# Altium PCB projet_pcb_etu.PCBDOC
Units mm, origin at the board's own origin, x right, y up, seen from the top; angles counter-clockwise.
Board outline 141.6 x 100.33 mm, 2 copper layers (TopLayer, BottomLayer); 68 components, 53 nets, 263 pads, 121 vias.
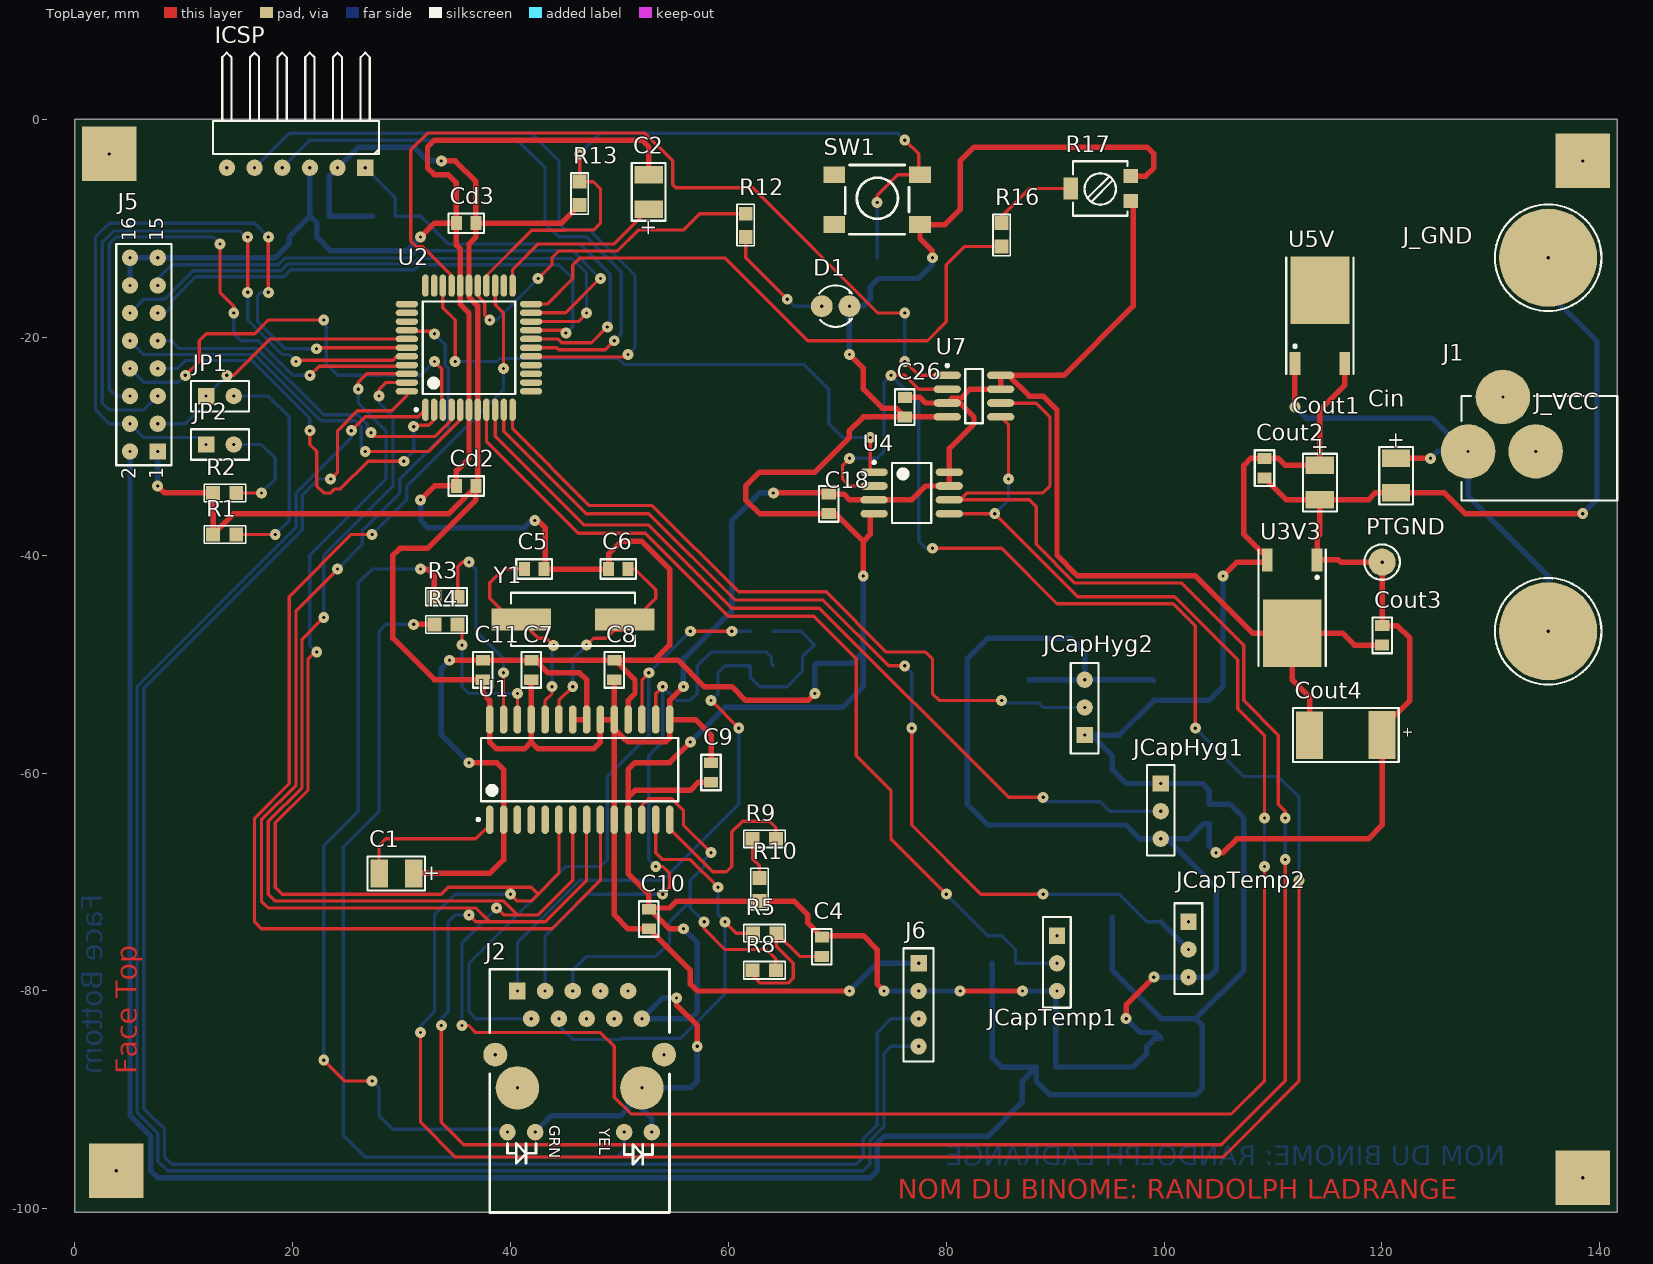
[diagram p0: TopLayer view]
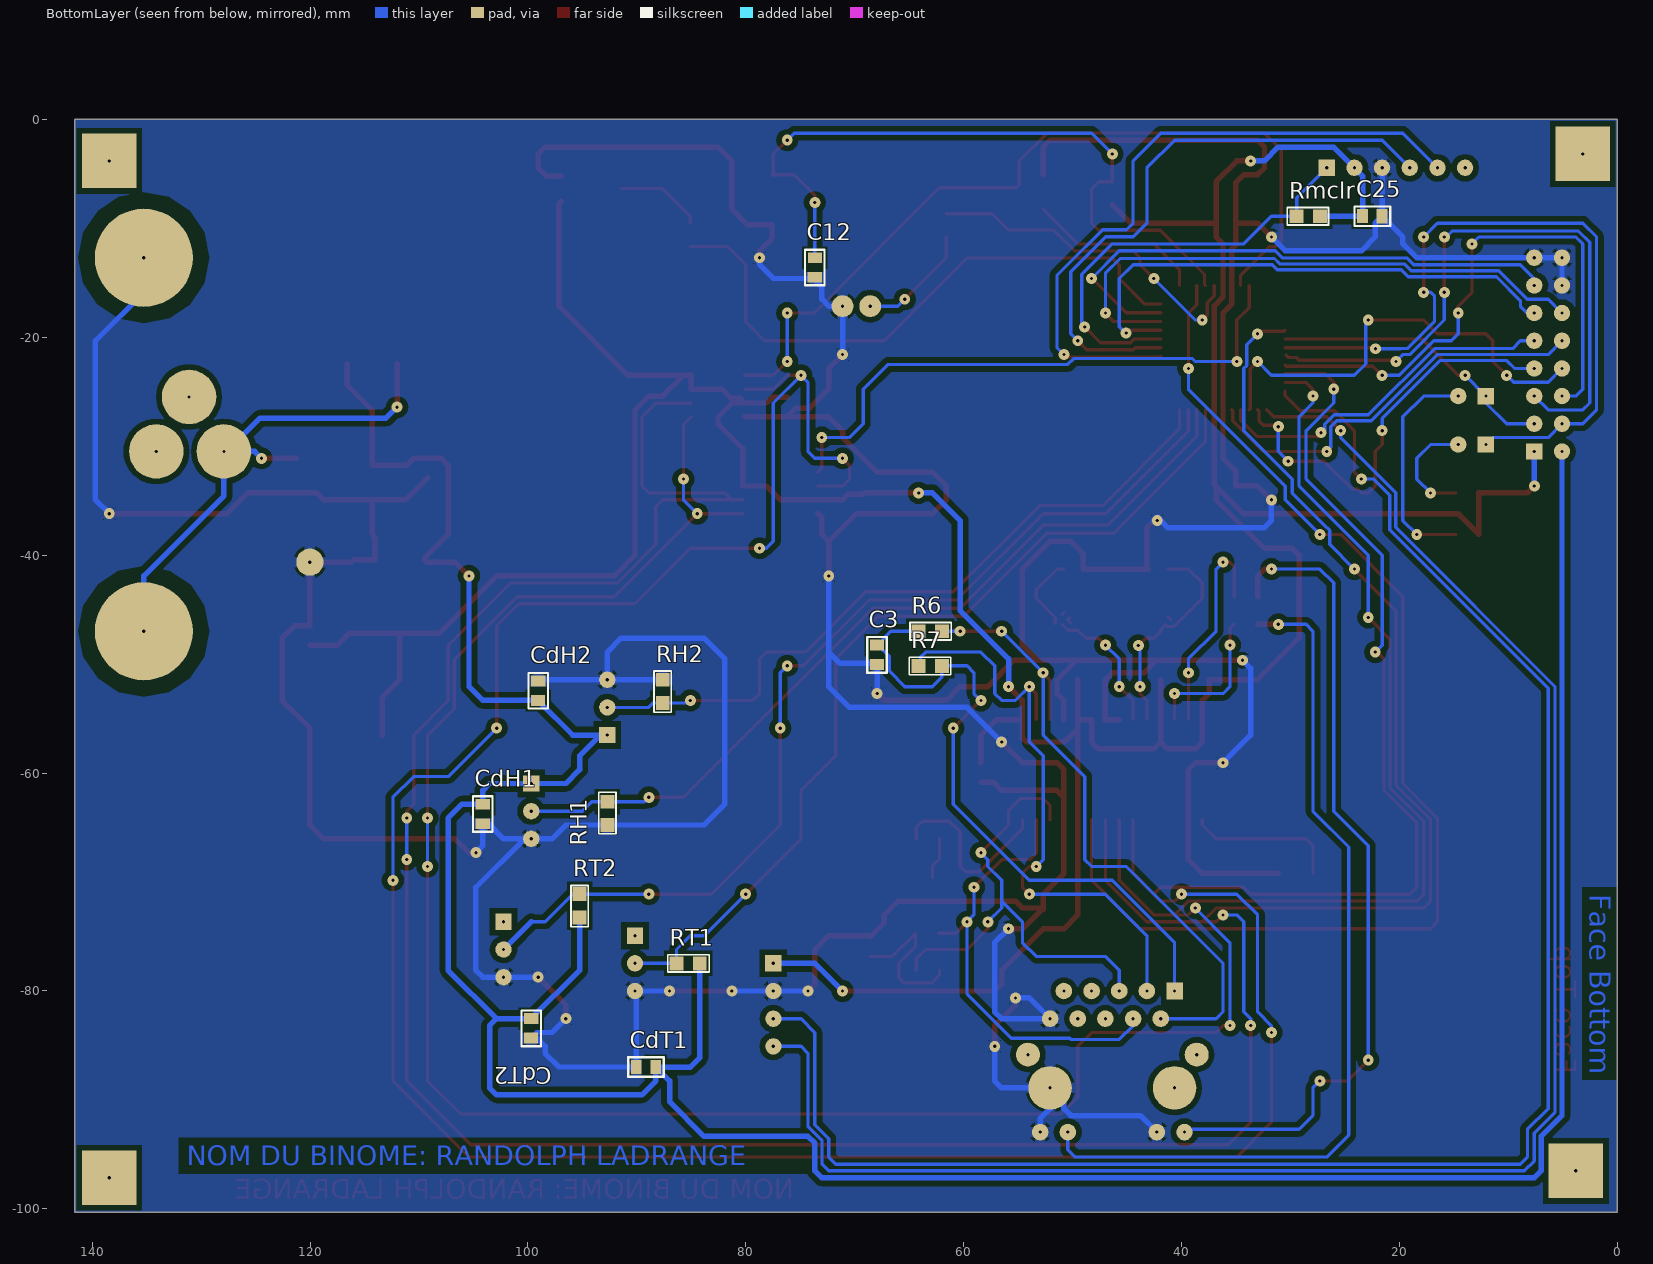
[diagram p1: BottomLayer view, seen from below]
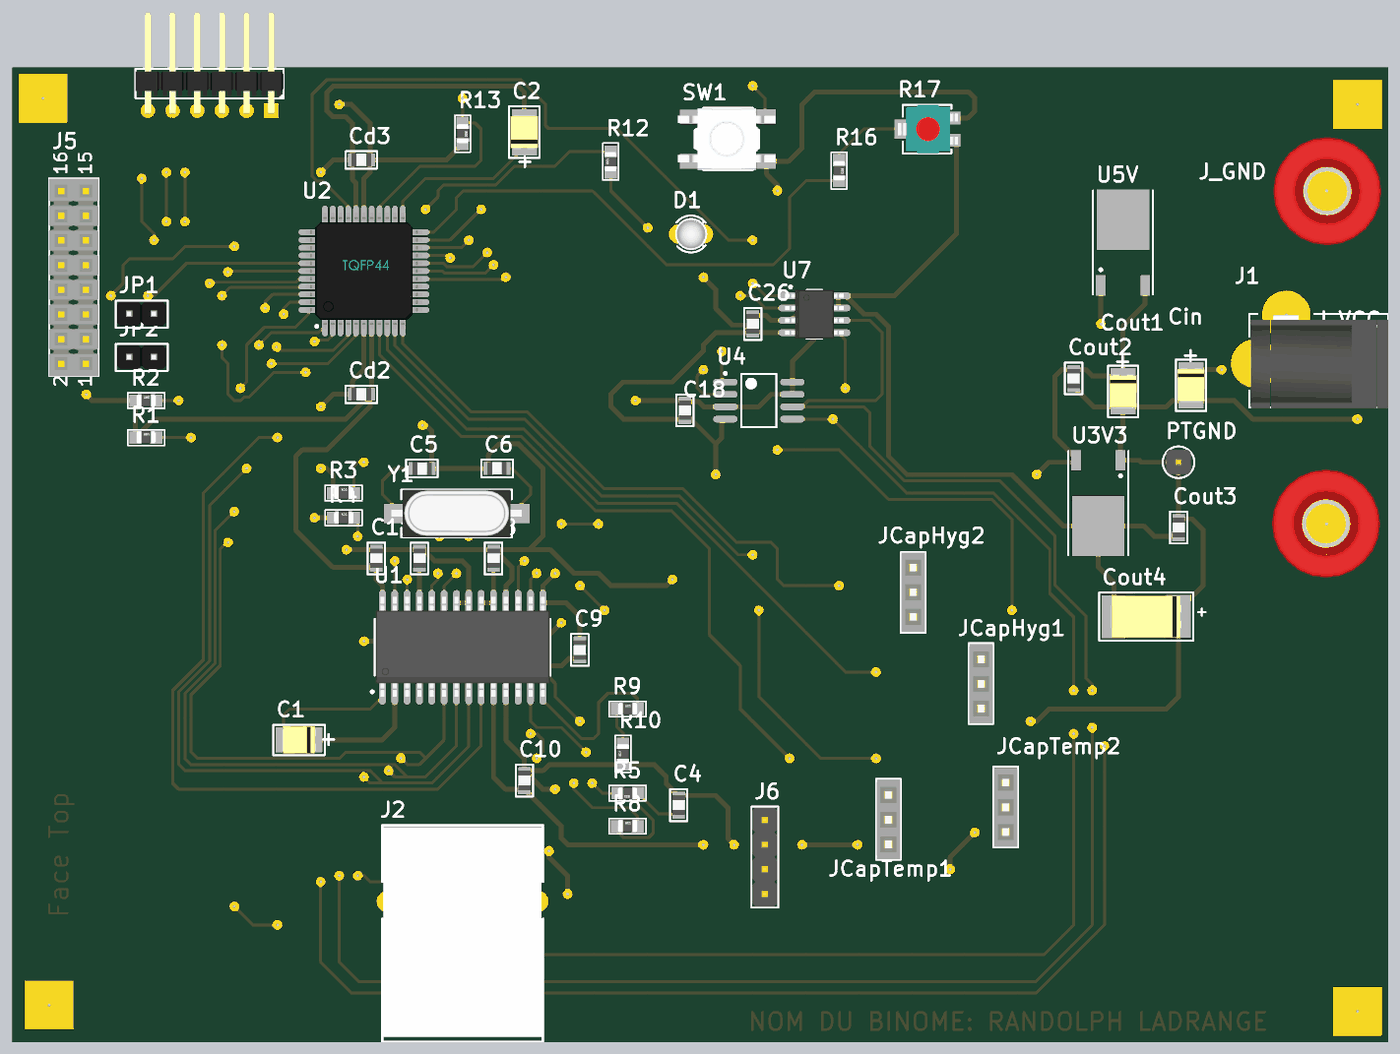
[diagram p2: 3D render of the assembled board from above, using the file's embedded part models]
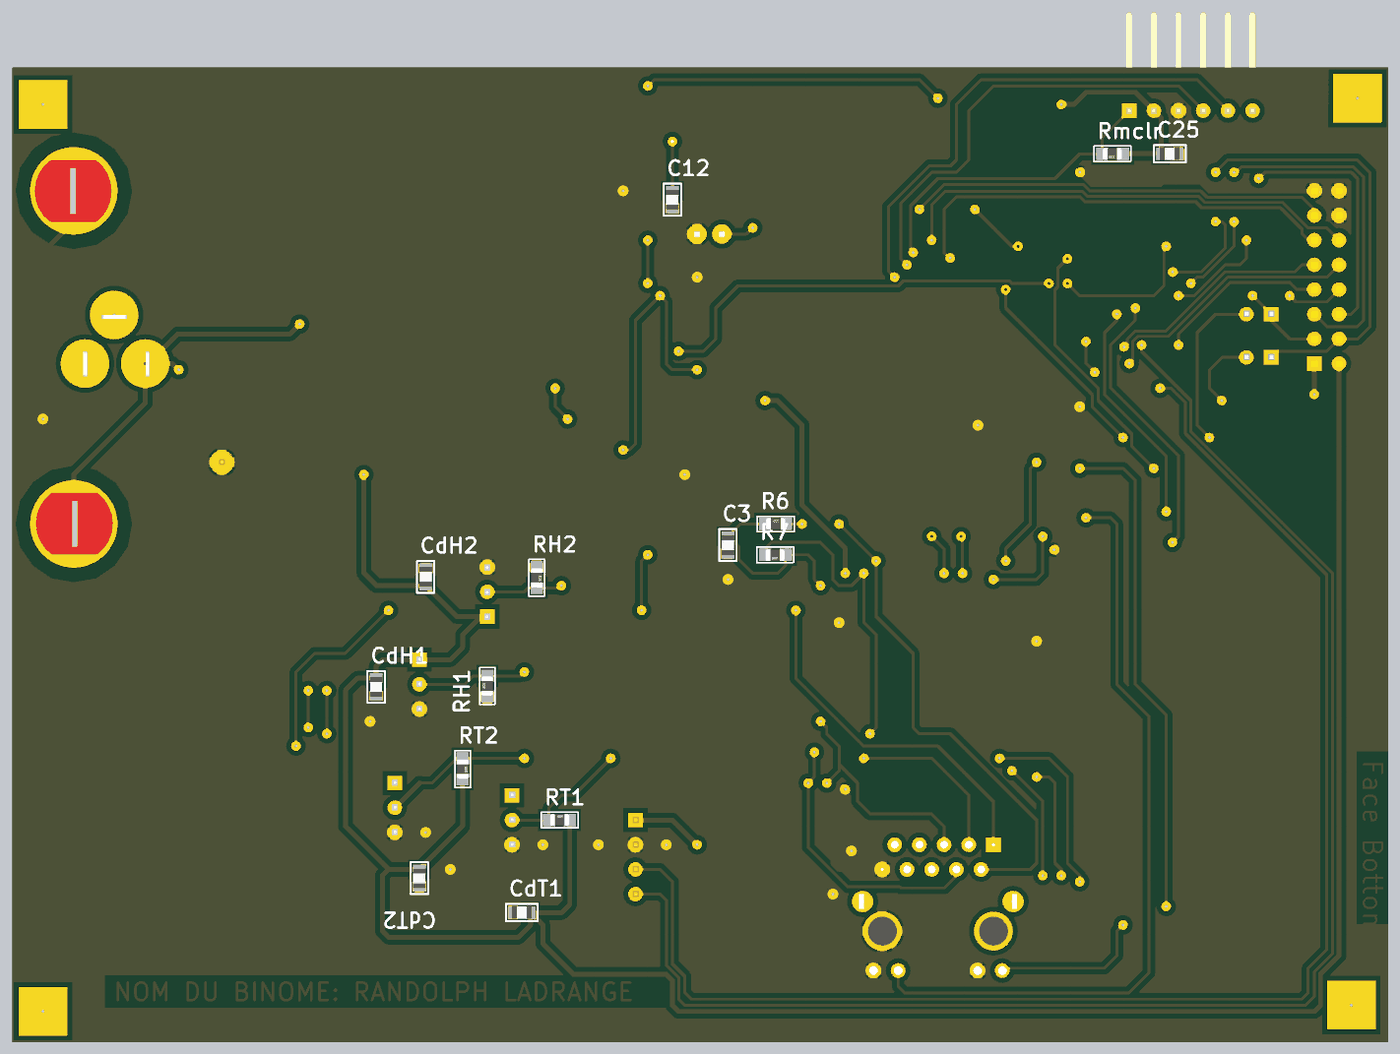
[diagram p3: 3D render of the assembled board from below, using the file's embedded part models]

## Layer stack, top to bottom
TopSolder: solder mask 0.0102, Solder Resist, Dk 3.5
TopLayer: signal copper 0.0356
Dielectric1: core 0.32, FR-4, Dk 4.8
BottomLayer: signal copper 0.0356
BottomSolder: solder mask 0.0102, Solder Resist, Dk 3.5

## Board outline
0,-100.33 141.605,-100.33 141.605,0 0,0

## Design rules (kind name [scope] priority, off if disabled: settings)
Clearance Clearance_4 [InNamedPolygon('gnd-bottom')] p1: gap=0.5
Clearance Clearance_3 [InNamedPolygon('gnd-bottom')] p2: gap=0.5
Clearance Clearance_2 [InNamedPolygon('gnd-bottom')] p3: gap=0.5
Clearance Clearance_1 [InNamedPolygon('gnd-bottom')] p4: gap=0.5
Clearance [All] p5: gap=0.25
FabricationTestPointUsage TestPointUsage [All] p1: valid=0 allowmultiple=FALSE
FabricationTestpoint Testpoint [All] p1: side=3 testpointundercomponent=TRUE minsize=1.016 maxsize=2.54 preferedsize=1.524 minholesize=0.508 maxholesize=1.016 preferedholesize=0.813 testpointgrid=0.025 allowsidetop=TRUE allowsidebottom=TRUE usegrid=TRUE gridtolerance=0
PlaneConnect [All] p1: planeconnectstyle=Relief reliefexpansion=0.5 reliefentries=4 reliefconductorwidth=1.016 reliefairgap=0.5
PolygonConnect [All] p1: connectstyle=Relief reliefconductorwidth=1.016 reliefentries=4 polygonreliefangle="90 Angle" airgapwidth=0.254
RoutingVias [All] p1: holewidth=0.6 width=1 viastyle="Through Hole" minholewidth=0.6 minwidth=1 maxholewidth=0.6 maxwidth=1
ShortCircuit [All] p1: allowed=TRUE
SilkToSolderMaskClearance SilkscreenOverComponentPads [IsPad] p1: minsilkscreentomaskgap=0.254 clearancetoexposedcopper=TRUE
SolderMaskExpansion [All] p1: expansion=0.051
Width Width_Power [All] p1: maxlimit=0.5 minlimit=0.3 preferedwidth=0.5
Width [All] p2: maxlimit=0.5 minlimit=0.3 preferedwidth=0.3
24 further rules are at their usual default settings.

## Components (designator, comment, footprint, x,y, rotation, side; value= is the part's Value field where it differs from the comment)
C1 "CMS_POLARISE_TANTALE_3528-21" CONDENSATEUR_CMS_POLARISE_TANTALE_B/3528-21 31.115,-69.215 r180 top
C2 "CMS_POLARISE_TANTALE_3528-21" CONDENSATEUR_CMS_POLARISE_TANTALE_B/3528-21 52.705,-8.255 r90 top
C3 "CMS_0805" CONDENSATEUR_CMS_0805 67.945,-48.26 r270 bottom
C4 "CMS_0805" CONDENSATEUR_CMS_0805 68.58,-76.835 r90 top
C5 "CMS_0805" CONDENSATEUR_CMS_0805 41.275,-41.275 r0 top
C6 "CMS_0805" CONDENSATEUR_CMS_0805 50.8,-41.275 r180 top
C7 "CMS_0805" CONDENSATEUR_CMS_0805 41.91,-51.435 r90 top
C8 "CMS_0805" CONDENSATEUR_CMS_0805 49.53,-51.435 r90 top
C9 "CMS_0805" CONDENSATEUR_CMS_0805 58.42,-59.055 r270 top
C10 "CMS_0805" CONDENSATEUR_CMS_0805 52.705,-74.295 r90 top
C11 "CMS_0805" CONDENSATEUR_CMS_0805 37.465,-51.435 r90 top
C12 "CMS_0805" CONDENSATEUR_CMS_0805 73.66,-12.7 r270 bottom
C18 "CMS_0805" CONDENSATEUR_CMS_0805 69.215,-36.195 r90 top
C25 "CMS_0805" CONDENSATEUR_CMS_0805 21.59,-8.89 r0 bottom
C26 "CMS_0805" CONDENSATEUR_CMS_0805 76.2,-27.305 r90 top
Cd2 "CMS_0805" CONDENSATEUR_CMS_0805 36.83,-33.655 r180 top
Cd3 "CMS_0805" CONDENSATEUR_CMS_0805 36.83,-9.525 r180 top
CdH1 "CMS_0805" CONDENSATEUR_CMS_0805 104.14,-62.865 r270 bottom
CdH2 "CMS_0805" CONDENSATEUR_CMS_0805 99.06,-53.34 r90 bottom
CdT1 "CMS_0805" CONDENSATEUR_CMS_0805 88.265,-86.995 r0 bottom
CdT2 "CMS_0805" CONDENSATEUR_CMS_0805 99.695,-82.55 r270 bottom
Cin "CMS_POLARISE_TANTALE_3528-21" CONDENSATEUR_CMS_POLARISE_TANTALE_B/3528-21 121.285,-31.115 r270 top
Cout1 "CMS_POLARISE_TANTALE_3528-21" CONDENSATEUR_CMS_POLARISE_TANTALE_B/3528-21 114.3,-31.75 r270 top
Cout2 "CMS_0805" CONDENSATEUR_CMS_0805 109.22,-31.115 r270 top
Cout3 "CMS_0805" CONDENSATEUR_CMS_0805 120.015,-48.26 r90 top
Cout4 "CMS_POLARISE_TANTALE_7343-31" CONDENSATEUR_CMS_POLARISE_TANTALE_D/7343-31 120.015,-56.515 r180 top
D1 "LED_3MM" LED_3MM 71.12,-17.145 r90 top
ICSP "BARRETTE_6 CONTACTS_1 RANGEE_MALE_COUDEE" BARRETTE_6_M_C 26.67,-4.445 r180 top
J1 "EMBASE_BASSE_TENSION_2.1mm" EMBASE_BASSE_TENSION_2.1mm 141.605,-30.48 r180 top
J2 "RJ45_MAGJACK_LEDS" RJ45_MAGJACK_LED 40.64,-80.01 r0 top
J5 "BARRETTE_8 CONTACTS_2 RANGEES_MALE_DROITE" BARRETTE_8X2_M_D 7.62,-30.48 r90 top
J6 "BARRETTE_4 CONTACTS_1 RANGEE_MALE_DROITE" BARRETTE_4_M_D 77.47,-77.47 r270 top
J_GND "DOUILLE BANANE 4mm COUDEE" DOUILLE_BANANE_4mm 135.255,-12.7 r0 top
J_VCC "DOUILLE BANANE 4mm COUDEE" DOUILLE_BANANE_4mm 135.255,-46.99 r180 top
JCapHyg1 "BARRETTE 3 CONTACTS 1 RANGEE FEMELLE DROITE" BARRETTE_3_F_D 99.695,-60.96 r270 top
JCapHyg2 "BARRETTE 3 CONTACTS 1 RANGEE FEMELLE DROITE" BARRETTE_3_F_D 92.71,-56.515 r90 top
JCapTemp1 "BARRETTE 3 CONTACTS 1 RANGEE FEMELLE DROITE" BARRETTE_3_F_D 90.17,-74.93 r270 top
JCapTemp2 "BARRETTE 3 CONTACTS 1 RANGEE FEMELLE DROITE" BARRETTE_3_F_D 102.235,-73.66 r270 top
JP1 "JUMPER2" BARRETTE_2_M_D 12.065,-25.4 r0 top
JP2 "JUMPER2" BARRETTE_2_M_D 12.065,-29.845 r0 top
PTGND "POINT_TEST" POINT_TEST 120.015,-40.64 r90 top
R1 "RESISTANCE_CMS_0805" RESISTANCE_CMS_0805 12.7,-38.1 r0 top
R2 "RESISTANCE_CMS_0805" RESISTANCE_CMS_0805 12.7,-34.29 r0 top
R3 "RESISTANCE_CMS_0805" RESISTANCE_CMS_0805 33.02,-43.815 r0 top
R4 "RESISTANCE_CMS_0805" RESISTANCE_CMS_0805 33.02,-46.355 r0 top
R5 "RESISTANCE_CMS_0805" RESISTANCE_CMS_0805 64.414,-74.702 r180 top
R6 "RESISTANCE_CMS_0805" RESISTANCE_CMS_0805 64.135,-46.99 r180 bottom
R7 "RESISTANCE_CMS_0805" RESISTANCE_CMS_0805 62.001,-50.165 r0 bottom
R8 "RESISTANCE_CMS_0805" RESISTANCE_CMS_0805 62.23,-78.105 r0 top
R9 "RESISTANCE_CMS_0805" RESISTANCE_CMS_0805 62.23,-66.04 r0 top
R10 "RESISTANCE_CMS_0805" RESISTANCE_CMS_0805 62.865,-71.755 r90 top
R12 "RESISTANCE_CMS_0805" RESISTANCE_CMS_0805 61.595,-10.795 r90 top
R13 "RESISTANCE_CMS_0805" RESISTANCE_CMS_0805 46.355,-5.715 r270 top
R16 "RESISTANCE_CMS_0805" RESISTANCE_CMS_0805 85.09,-9.525 r270 top
R17 "RESISTANCE_VARIABLE_CMS : TS53YL" TRIMMER_CMS_TS53YL 91.44,-6.35 r90 top
RH1 "RESISTANCE_CMS_0805" RESISTANCE_CMS_0805 92.71,-64.77 r90 bottom
RH2 "RESISTANCE_CMS_0805" RESISTANCE_CMS_0805 87.63,-51.435 r270 bottom
Rmclr "RESISTANCE_CMS_0805" RESISTANCE_CMS_0805 27.305,-8.89 r0 bottom
RT1 "RESISTANCE_CMS_0805" RESISTANCE_CMS_0805 86.36,-77.47 r180 bottom
RT2 "RESISTANCE_CMS_0805" RESISTANCE_CMS_0805 95.25,-71.12 r270 bottom
SW1 "BOUTON_POUSSOIR_MINIATURE_CMS" BOUTON_POUSS_CMS 70.485,-5.08 r0 top
U1 "ENC28J60" SOIC28_PAS=1.27_LARG=10.3_LONG=18 46.355,-59.69 r90 top
U2 "PIC18F47J13-I/PT_TQFP44" TQFP44_PAS=0.8_LARG=12_LONG=12 36.195,-20.955 r90 top
U3V3 "REGULATEUR_TO220_78XX" TO-252 111.76,-43.815 r180 top
U4 "25LC1024" SOP8_PAS=1.27_LARG=6_LONG=5.2 76.835,-34.29 r0 top
U5V "REGULATEUR_TO220_78XX" TO-252 114.3,-19.05 r0 top
U7 "25AA02E48" SOIC8_PAS=1.27_LARG=4_LONG=5 82.55,-25.4 r0 top
Y1 "QUARTZ_CMS_HC49/4S" QUARTZ_CMS_HC49/4S 42.545,-46.355 r0 top

## Footprints (in the part's own frame and the unit in brackets; to place one, negate y for a bottom-side part, rotate by r counter-clockwise, add the part's x,y. Pads: shape width x height; smd on the part's side, far side on the other; paste and mask are expansions set on the pad)
BARRETTE_2_M_D [mm] "BARRETTE 2 CONTACTS ; 1 RANGEE ; DROITE ; MALE ; ESPACEMENT BROCHES = 2.54 mm"
  rect 1.5x1.5 hole 0.3: 1(0,0)
  round 1.5 hole 0.3: 2(2.54,0)
  silkscreen extent -1.4,-1.4 3.94,1.4, body extent -1.3,-1.2 3.78,1.3, height 8.55
BARRETTE_3_F_D [mm] "BARRETTE 3 CONTACTS ; 1 RANGEE ; DROITE ; FEMELLE ; ESPACEMENT BROCHES = 2.54 mm"
  rect 1.5x1.5 hole 0.3: 1(0,0)
  round 1.5 hole 0.3: 2(2.54,0) 3(5.08,0)
  silkscreen extent -1.7,-1.27 6.61,1.27, body extent -1.56,-1.21 6.56,1.2, height 8.5
BARRETTE_4_M_D [mm] "BARRETTE 4 CONTACTS ; 1 RANGEE ; DROIT ; MALE ; ESPACEMENT BROCHES = 2.54 mm"
  rect 1.5x1.5 hole 0.3: 1(0,0)
  round 1.5 hole 0.3: 2(2.54,0) 3(5.08,0) 4(7.62,0)
  silkscreen extent -1.38,-1.4 9.01,1.36, body extent -1.28,-1.3 8.88,1.24, height 10.1
BARRETTE_6_M_C [mm] "BARRETTE 6 CONTACTS ; 1 RANGEE ; COUDEE ; MALE ; ESPACEMENT BROCHES = 2.54 mm"
  rect 1.5x1.5 hole 0.3: 1(0,0)
  round 1.5 hole 0.3: 2(2.54,0) 3(5.08,0) 4(7.62,0) 5(10.16,0) 6(12.7,0)
  silkscreen extent -1.27,-10.57 13.97,-1.27, body extent -1.27,-10.14 13.97,0.34, height 3.18
BARRETTE_8X2_M_D [mm] "BARRETTE 8 CONTACTS ; 2 RANGEES ; DROITE ; MALE ; ESPACEMENT BROCHES = 2.54 mm"
  rect 1.5x1.5 hole 0.3: 1(0,0)
  round 1.5 hole 0.3: 2(0,2.54) 3(2.54,0) 4(2.54,2.54) 5(5.08,0) 6(5.08,2.54) 7(7.62,0) 8(7.62,2.54) 9(10.16,0) 10(10.16,2.54) 11(12.7,0) 12(12.7,2.54) 13(15.24,0) 14(15.24,2.54) 15(17.78,0) 16(17.78,2.54)
  silkscreen extent -1.27,-1.27 19.05,3.81, body extent -1.3,-1.24 19.02,3.84, height 10.67
BOUTON_POUSS_CMS [mil]
  rect 78.74x60 smd: 1(280,-180) 2(-30,-180) 3(280,0)
  rect 78.74x59.06 smd: 4(-30,0)
  silkscreen extent 10,-215 240,35, body extent -78,-215 318,35, height 219
CONDENSATEUR_CMS_0805 [mm] "CONDENSATEUR CMS 0805 ; DIMENSIONS : 2mm x 1.25mm"
  rect 1x1.3 smd: 1(0,0) 2(1.79,-0.01)
  silkscreen extent -0.74,-0.9 2.53,0.89, body extent -0.09,-0.67 1.91,0.64, height 0.73
CONDENSATEUR_CMS_POLARISE_TANTALE_B/3528-21 [mm] "CONDENSATEUR CMS POLARISE TANTALE BOITIER B ; DIMENSIONS : 3.5mm x 2.8mm"
  rect 1.6x2.6 smd: 1(0,0) 2(3.175,0)
  silkscreen extent -1.05,-1.54 4.25,1.57, body extent -0.16,-1.39 3.33,1.41, height 1.91
CONDENSATEUR_CMS_POLARISE_TANTALE_D/7343-31 [mm] "CONDENSATEUR CMS POLARISE TANTALE BOITIER D ; DIMENSIONS : 7.3mm x 4.3mm"
  rect 2.5x4.4 smd: 1(0,0) 2(6.66,0.02)
  silkscreen extent -1.52,-2.47 8.17,2.47, body extent -0.32,-2.14 6.98,2.16, height 2.81
DOUILLE_BANANE_4mm [mm] "DOUILLE BANANE ; DIAMETRE PASSAGE CONTACT = 4 mm ; DIAMETRE PERCAGE = 6 mm"
  round 9 hole 0.3: 1(0,0)
  TopLayer pour cut-out: -5.55,2.35 -4.2,4.3 -2.3,5.6 0,6 2.3,5.6 4.2,4.3 5.55,2.35 6,0 5.55,-2.35 4.3,-4.25 2.35,-5.55 0,-6 -2.35,-5.55 -4.2,-4.3 -5.55,-2.35 -6,0
  BottomLayer pour cut-out: -5.55,2.35 -4.2,4.3 -2.3,5.6 0,6 2.3,5.6 4.2,4.3 5.55,2.35 6,0 5.55,-2.35 4.3,-4.25 2.35,-5.55 0,-6 -2.35,-5.55 -4.2,-4.3 -5.55,-2.35 -6,0
  silkscreen extent -4.89,-4.89 4.89,4.89, body extent -5.5,-5.6 5.63,5.53, height 4.79
EMBASE_BASSE_TENSION_2.1mm [mm] "EMBASE D'ALIMENTATION BASSE TENSION ; FEMELLE ; CONTACT REPOS ENTRE 2/3 ; MONTAGE PCB ; COUDE ; ESPACEMENT BROCHES = 6.2mm/5.08mm"
  round 5 hole 0.3: 1(13.7,0) 2(10.5,-5) 3(7.5,0)
  silkscreen extent 0,-5.1 14.3,4.5, body extent 0.03,-4.98 14.18,4.6, height 11.05
LED_3MM [mil] "LED 3MM ; ESPACEMENT BROCHES : 2.54mm"
  round 79 hole 11.81: 1(0,100) 2(0,0)
  silkscreen extent -75,-10 75,109, body extent -65,-16 65,114, height 217
POINT_TEST [mm] "PASTILLE TRAVERSANTE ; DIAMETRE = 2.5 mm ; DIAMETRE PERCAGE = 1.3 mm"
  round 2.5 hole 0.3: 1(0,0)
  silkscreen extent -1.62,-1.63 1.62,1.63, body extent -1.24,-1.27 1.3,1.27, height 5.94
QUARTZ_CMS_HC49/4S [mm] "QUARTZ CMS HC49 ;  DIMENSIONS : 11.4mm x 4.9mm ; ESPACEMENT BROCHES : 9.5mm"
  rect 5.5x2 smd: 1(-1.554,0.447) 2(7.945,0.447)
  silkscreen extent -2.5,-2 8.89,2.9, body extent -3.5,-2 9.9,2.9, height 5.08
RESISTANCE_CMS_0805 [mil] "RESISTANCE CMS 0805 ; DIMENSIONS : 2mm x 1.25mm"
  rect 50x50 smd: 1(0,0) 2(84,0)
  silkscreen extent -31,-31 118,31, body extent 4,-24 83,26, height 31
RJ45_MAGJACK_LED [mm]
  rect 1.524x1.524 hole 0.3: 1(0,0)
  round 1.524 hole 0.3: 2(1.27,-2.54) 3(2.54,0) 4(3.81,-2.54) 5(5.08,0) 6(6.35,-2.54) 7(7.62,0) 8(8.89,-2.54) 9(10.16,0) 10(11.43,-2.54) 15(-0.91,-12.95) 16(1.63,-12.95) 17(9.8,-12.95) 18(12.34,-12.95)
  round 2.2 hole 0.3: 11(-2.03,-5.84) 12(13.46,-5.84)
  round 4 hole 0.3: 13(0,-8.89) 14(11.43,-8.89)
  silkscreen extent -2.54,-20.32 13.97,2, body extent -2.43,-19.79 13.83,1.8, height 13.86
SOIC8_PAS=1.27_LARG=4_LONG=5 [mm] "Small Outline Integrated Circuit ; 8 Leads ; Body Width = 4 mm ; Pitch = 1.27 mm ; IPC Low Density"
  oval 2.5x0.7 smd: 1(-2.45,1.905) 2(-2.45,0.635) 3(-2.45,-0.635) 4(-2.45,-1.905) 5(2.45,-1.905) 6(2.45,-0.635) 7(2.45,0.635) 8(2.45,1.905)
  silkscreen extent -2.57,-2.5 0.8,2.93, body extent -3.01,-2.5 3,2.5, height 1.75
SOIC28_PAS=1.27_LARG=10.3_LONG=18 [mm] "28-Pin Plastic Small Outline Integrated Circuit ; 28 Leads ; Body Width = 7.5 mm ; Pitch = 1.27 mm ; IPC Low Density"
  oval 2.6x0.7 smd: 1(-4.6,8.255) 2(-4.6,6.985) 3(-4.6,5.715) 4(-4.6,4.445) 5(-4.6,3.175) 6(-4.6,1.905) 7(-4.6,0.635) 8(-4.6,-0.635) 9(-4.6,-1.905) 10(-4.6,-3.175) 11(-4.6,-4.445) 12(-4.6,-5.715) 13(-4.6,-6.985) 14(-4.6,-8.255) 15(4.6,-8.255) 16(4.6,-6.985) 17(4.6,-5.715) 18(4.6,-4.445) 19(4.6,-3.175) 20(4.6,-1.905) 21(4.6,-0.635) 22(4.6,0.635) 23(4.6,1.905) 24(4.6,3.175) 25(4.6,4.445) 26(4.6,5.715) 27(4.6,6.985) 28(4.6,8.255)
  silkscreen extent -4.7,-9.05 2.9,9.42, body extent -5.1,-8.95 5.2,8.95, height 2.65
SOP8_PAS=1.27_LARG=6_LONG=5.2 [mm] "Small Outline Package ; 8 Leads ; Body Width : 3.95 mm ; Pitch = 1.27 mm ; IPC Low Density"
  oval 2.5x0.7 smd: 1(-3.45,1.905) 2(-3.45,0.635) 3(-3.45,-0.635) 4(-3.45,-1.905) 5(3.45,-1.905) 6(3.45,-0.635) 7(3.45,0.635) 8(3.45,1.905)
  silkscreen extent -3.57,-2.75 1.8,2.93, body extent -2,-2.75 2,2.75, height 2.13
TO-252 [mm] "D-PAK/TO-252-AA; 3 Leads (1 Cropped); Body 10.1 (inc. leads) x 6.6 mm (LxW max)"
  rect 1x2.1 smd: 1(-2.285,-3.375) 3(2.285,-3.375)
  rect 5.4x6.2 smd: 4(0,3.375)
  silkscreen extent -3.08,-4.33 3.08,6.37
TQFP44_PAS=0.8_LARG=12_LONG=12 [mm] "Thin Plastic Quad Flat Pack Package ; 44 Leads ; Body : 10 mm x 10 mm ; Pitch = 0.8 mm ; IPC Low Density"
  oval 2.05x0.6 smd: 1(-5.7,4) 2(-5.7,3.2) 3(-5.7,2.4) 4(-5.7,1.6) 5(-5.7,0.8) 6(-5.7,0) 7(-5.7,-0.8) 8(-5.7,-1.6) 9(-5.7,-2.4) 10(-5.7,-3.2) 11(-5.7,-4) 23(5.7,-4) 24(5.7,-3.2) 25(5.7,-2.4) 26(5.7,-1.6) 27(5.7,-0.8) 28(5.7,0) 29(5.7,0.8) 30(5.7,1.6) 31(5.7,2.4) 32(5.7,3.2) 33(5.7,4)
  oval 0.6x2.05 smd: 12(-4,-5.7) 13(-3.2,-5.7) 14(-2.4,-5.7) 15(-1.6,-5.7) 16(-0.8,-5.7) 17(0,-5.7) 18(0.8,-5.7) 19(1.6,-5.7) 20(2.4,-5.7) 21(3.2,-5.7) 22(4,-5.7) 34(4,5.7) 35(3.2,5.7) 36(2.4,5.7) 37(1.6,5.7) 38(0.8,5.7) 39(0,5.7) 40(-0.8,5.7) 41(-1.6,5.7) 42(-2.4,5.7) 43(-3.2,5.7) 44(-4,5.7)
  silkscreen extent -5.82,-4.25 4.25,4.97, body extent -6,-6 6,6, height 1.03
TRIMMER_CMS_TS53YL [mm] "TRIMMER CMS TS53YL ; DIMENSIONS : 6.2mm x 5mm ; ESPACEMENT BROCHES : 4.2mm ET 1mm"
  rect 1.3x1.3 smd: 1(-1.15,-5.5) 3(1.15,-5.5)
  rect 2x1.3 smd: 2(0,0)
  silkscreen extent -2.5,-5.2 2.5,-0.2, body extent -2.5,-5.9 2.5,0.3, height 2.55

## Part data
C1 C2 Cin Cout1: library part CONDENSATEUR_CMS_POL_TANT_B_3528-21, "CONDENSATEUR CMS POLARISE TANTALE BOITIER B/3528-21"
C3 C4 C5 C6 C7 C8 C9 C10 C11 C12 C18 C25 C26 Cd2 Cd3 CdH1 CdH2 CdT1 CdT2 Cout2 Cout3: library part CONDENSATEUR_CMS_CER_0805, "CONDENSATEUR CMS CERAMIQUE 0805"
Cout4: library part CONDENSATEUR_CMS_POL_TANT_D_7343-31, "CONDENSATEUR CMS POLARISE TANTALE BOITIER D/7343-31"
D1: "LED 3MM - ROUGE/VERTE/JAUNE"
ICSP: "BARRETTE 6 CONTACTS 1 RANGEE MALE COUDEE"
J1: "EMBASE BASSE TENSION 2.1mm"
J2: "EMBASE RJ45_MAGJACK_LEDS"
J6: "BARRETTE 4 CONTACTS 1 RANGEE MALE DROITE"
J_GND J_VCC: library part DOUILLE_BANANE_4mm_COUDEE, "DOUILLE BANANE 4 mm COUDEE"
JCapHyg1 JCapHyg2 JCapTemp1 JCapTemp2: library part "BARRETTE_3 CONTACTS_1 RANGEE_FEMELLE_DROITE"
JP1 JP2: "BARRETTE 2 CONTACTS 1 RANGEE MALE DROITE"
PTGND: "POINT TEST"
R1 R2 R3 R4 R5 R6 R7 R8 R9 R10 R12 R13 R16 RH1 RH2 Rmclr RT1 RT2: "RESISTANCE CMS 0805"
R17: "RESISTANCE VARIABLE_CMS : TS53YL"
SW1: "BOUTON POUSSOIR MINIATURE CMS ON/OFF"
U2: "MICROCONTROLEUR 8 BITS - 36 I/O - 32 KO : FLASH - 16 KMOTS : MEMOIRE PROG - 4 TIMERS - 256 OCTETS : EEPROM - 1536 OCTETS : RAM - 13 CANAUX A/D 10 BITS - 40 MHz : HORLOGE - TQFP44"
U3V3 U5V: "REGULATEUR DE TENSION POSITIVE 78XX BOITIER TO220"
Y1: "QUARTZ CMS HC49/4S"

## Free pads (board coordinates)
  rect 5x5 hole 0.3: 1(3.175,-3.175) 2(3.81,-96.52) 3(138.43,-97.155) 4(138.43,-3.81)

## Via types
v1: diameter 1, hole 0.3, TopLayer to BottomLayer, 121 vias

## Nets (pads, with @x,y where several pads share a name; then routed paths per layer and width w, separated by ;. In a path a pad name is that pad's centre, name@x,y a point inside that pad or via, vN(x,y) a via of type N, cw(c..) or ccw(c..) an arc to the next point about the centre after c; other vN are vias at no path point)
+3V3: C7.1 C8.1 C9.1 C10.1 C11.1 C18.2 C25.2 C26.2 Cd2.1 Cd3.1 Cout3.1 Cout4.2 ICSP.2 J5.1 J6.1 R1.1 R2.1 R13.2 R17.1 Rmclr.1 U1.10 U1.15 U1.19 U1.20 U1.25 U1.28 U2.7 U2.28 U3V3.4 U4.3 U4.7 U4.8 U7.3 U7.7 U7.8 | length 374.2
  TopLayer w0.5: v1(7.62,-33.655) 8.255,-34.29 R2.1 R1.1 14.605,-36.195 34.347,-36.195 Cd2.1@36.83,-33.712 ; v1(33.655,-3.81) 34.925,-3.81 36.83,-5.715 Cd3.1 ; C7.1 U1.25 41.91,-57.15 ; R13.2 44.679,-9.525 Cd3.1 ; C8.1 U1.19 ; v1(55.88,-52.07) 54.61,-53.34 U1.15 ; C9.1 58.42,-56.515 56.995,-55.09 U1.15 ; v1(64.135,-34.29) 69.11,-34.29 C18.2 70.6,-34.405 71.12,-34.925 U4.3 76.835,-34.925 78.105,-33.655 U4.7 U4.8 80.285,-30.205 82.55,-27.94 82.55,-27.305 81.28,-26.035 U7.3 ; v1(71.12,-80.01) 57.15,-80.01 56.515,-79.375 56.515,-78.105 C10.1 50.8,-74.295 49.53,-73.025 U1.10 U1.19@49.53,-55.972 ; C26.2 77.585,-25.515 78.105,-26.035 U7.3 ; R17.1 97.155,-7.715 97.155,-17.145 90.805,-23.495 U7.8@85.725,-23.495 ; Cout4.2 113.355,-53.03 111.76,-51.435 U3V3.4 ; Cout3.1 117.475,-48.26 116.405,-47.19 U3V3.4 ; Cd2.1@36.83,-33.712 Cd2.1 36.995,-33.49 U2.7 36.995,-17.111 36.195,-16.311 U2.28 36.195,-11.43 36.83,-10.795 Cd3.1 ; Cd2.1@36.83,-33.712 36.83,-34.925 32.385,-39.37 29.845,-39.37 29.21,-40.005 29.21,-47.625 33.02,-51.435 C11.1 37.465,-52.705 38.1,-53.34 U1.28 38.1,-57.15 38.735,-57.785 41.275,-57.785 41.91,-57.15 ; 41.91,-57.15 42.545,-57.785 47.625,-57.785 48.26,-57.15 U1.20 U1.19 ; U1.19@49.53,-55.972 U1.19 ; U1.19@49.53,-55.972 50.448,-56.89 50.54,-56.89 50.8,-57.15 54.25,-57.15 54.61,-56.79 U1.15 ; U7.3 80.52,-25.615 81.352,-25.615 82.202,-24.765 U7.7 U7.8 U7.8@85.725,-23.495 ; U7.8@85.725,-23.495 87.63,-25.4 88.9,-25.4 90.17,-26.67 90.17,-40.005 92.075,-41.91 102.87,-41.91 108.15,-47.19 U3V3.4
  BottomLayer w0.5: v1(7.62,-33.655) J5.1 ; Rmclr.1 27.295,-8.88 C25.2 23.38,-5.195 ICSP.2 25.115,-3.46 25.13,-3.46 26.035,-2.555 31.13,-2.555 32.385,-3.81 v1(33.655,-3.81) ; v1(55.88,-52.07) 55.88,-49.53 60.325,-45.085 60.325,-36.83 62.865,-34.29 v1(64.135,-34.29) ; v1(71.12,-80.01) 73.66,-77.47 J6.1
+5V: CdH1.1 CdH2.1 CdT1.1 CdT2.1 Cout1.1 Cout2.1 J5.2 JCapHyg1.1 JCapHyg2.1 RT1.2 RT2.2 U3V3.3 U5V.3 | length 302.1
  TopLayer w0.5: v1(105.41,-41.91) 106.68,-40.64 109.275,-40.64 U3V3.3 109.475,-40.26 107.315,-38.1 107.315,-31.75 107.95,-31.115 Cout2.1 110.49,-31.115 111.125,-31.75 Cout1.1 114.3,-26.67 116.585,-24.385 U5V.3
  BottomLayer w0.5: J5.2 5.08,-91.44 6.985,-93.345 6.985,-96.52 7.635,-97.17 73.01,-97.17 73.66,-96.52 73.66,-93.98 74.295,-93.345 83.82,-93.345 86.995,-90.17 86.995,-88.265 CdT1.1 ; RT1.2 84.226,-86.131 85.09,-86.995 CdT1.1 ; JCapHyg2.1 JCapHyg2.1@93.345,-56.515 ; RT2.2 95.25,-78.105 CdT2.1 102.87,-82.55 ; v1(105.41,-41.91) 105.41,-52.07 104.14,-53.34 CdH2.1 95.885,-56.515 JCapHyg2.1@93.345,-56.515 ; CdT1.1 88.265,-88.265 89.535,-89.535 102.868,-89.535 103.505,-88.898 103.505,-83.185 102.87,-82.55 ; JCapHyg2.1@93.345,-56.515 95.25,-58.42 95.25,-59.69 96.52,-60.96 JCapHyg1.1 103.505,-60.96 104.14,-61.595 CdH1.1 106.045,-62.865 107.315,-64.135 107.315,-78.105 102.87,-82.55
AN8: JCapTemp2.2 RT2.1 U2.10 | length 92.7
  TopLayer w0.3: U2.10 39.395,-28.646 46.944,-36.195 52.712,-36.195 60.635,-44.118 68.674,-44.118 74.721,-50.165 v1(76.2,-50.165) ; v1(76.835,-55.88) 76.835,-64.77 83.185,-71.12 v1(88.9,-71.12)
  BottomLayer w0.3: v1(76.2,-50.165) 76.835,-50.8 v1(76.835,-55.88) ; v1(88.9,-71.12) RT2.1 95.885,-71.12 98.425,-73.66 99.695,-73.66
  BottomLayer w0.5: 99.695,-73.66 JCapTemp2.2
AN9: JCapHyg2.2 RH2.2 U2.11 | length 66.7
  TopLayer w0.3: U2.11 40.195,-28.385 47.255,-35.445 53.023,-35.445 60.946,-43.368 68.985,-43.368 74.511,-48.895 78.105,-48.895 78.74,-49.53 78.74,-52.705 79.375,-53.34 v1(85.09,-53.34)
  BottomLayer w0.3: v1(85.09,-53.34) 85.319,-53.569 RH2.2 88.494,-53.569 88.9,-53.975 JCapHyg2.2
AN10: JCapHyg1.2 RH1.2 U2.9 | length 77.8
  TopLayer w0.3: U2.9 38.595,-29.07 46.76,-37.235 52.691,-37.235 60.325,-44.868 68.363,-44.868 85.725,-62.23 v1(88.9,-62.23)
  BottomLayer w0.3: v1(88.9,-62.23) 89.306,-62.636 RH1.2 94.131,-62.636 94.995,-63.5 JCapHyg1.2
AN12: JCapTemp1.2 RT1.1 U2.8 | length 83.7
  TopLayer w0.3: U2.8 37.795,-29.54 46.24,-37.985 52.381,-37.985 60.014,-45.618 67.843,-45.618 71.755,-49.53 71.755,-58.42 74.93,-61.595 74.93,-66.04 v1(80.01,-71.12)
  BottomLayer w0.3: v1(80.01,-71.12) 83.82,-74.93 85.09,-74.93 86.36,-76.2 RT1.1 JCapTemp1.2
GND: C1.1 C2.2 C3.2 C4.2 C5.2 C6.2 C7.2 C8.2 C9.2 C10.2 C11.2 C12.2 C18.1 C25.1 C26.1 Cd2.2 Cd3.2 CdH1.2 CdH2.2 CdT1.2 CdT2.2 Cin.2 Cout1.2 Cout2.2 Cout3.2 Cout4.1 D1.2 ICSP.3 J2.10 J2.14 J2.16 J2.18 J5.14 J5.15 J5.16 J6.2 J_GND.1 JCapHyg1.3 JCapHyg2.3 JCapTemp1.3 JCapTemp2.3 PTGND.1 R10.1 R17.3 RH1.1 RH2.1 SW1.1 U1.2 U1.11 U1.18 U1.21 U1.22 U2.6 U2.29 U3V3.1 U4.4 U7.4 | length 716.9
  TopLayer w0.5: C1.1 38.1,-69.215 39.37,-67.945 U1.2 39.37,-59.69 38.735,-59.055 v1(36.195,-59.055) ; v1(31.75,-34.925) 33.03,-33.645 Cd2.2 35.04,-32.27 36.195,-31.115 U2.6 36.195,-17.78 35.395,-16.98 U2.29 35.395,-11.9 35.04,-11.545 Cd3.2 ; v1(31.75,-10.795) 33.03,-9.515 Cd3.2 ; v1(34.405,-49.645) C11.2 C7.2 C7.2@42.29,-49.645 ; v1(42.227,-36.83) 42.545,-36.83 43.18,-37.465 43.18,-41.17 C5.2 49.01,-41.285 C6.2 49.01,-39.89 50.165,-38.735 52.07,-38.735 54.61,-41.275 54.61,-48.26 53.225,-49.645 ; U1.22 U1.21 46.99,-51.435 46.355,-50.8 43.445,-50.8 C7.2@42.29,-49.645 ; U1.18 50.8,-53.34 51.435,-52.705 51.435,-51.483 C8.2@49.597,-49.645 ; C2.2 52.705,-2.54 52.07,-1.905 33.02,-1.905 32.385,-2.54 32.385,-4.445 33.02,-5.08 34.29,-5.08 35.04,-5.83 Cd3.2 ; v1(55.245,-80.645) 55.245,-81.28 57.15,-83.185 v1(57.15,-85.09) ; v1(55.88,-74.295) 54.61,-74.295 52.82,-72.505 C10.2 ; v1(56.515,-57.15) 54.61,-59.055 51.435,-59.055 50.8,-59.69 50.8,-62.23 ; C9.2 57.265,-60.845 56.515,-61.595 51.435,-61.595 50.8,-62.23 ; v1(67.945,-52.705) 67.31,-53.34 61.595,-53.34 60.325,-52.07 57.785,-52.07 55.36,-49.645 53.225,-49.645 ; v1(71.12,-21.59) 72.39,-22.86 72.39,-24.765 74.14,-26.515 75.41,-26.515 C26.1 ; v1(72.39,-41.91) 72.39,-38.735 ; U4.4 73.025,-36.555 73.025,-38.1 72.39,-38.735 ; v1(74.295,-80.01) 73.66,-79.375 73.66,-76.2 72.39,-74.93 68.705,-74.93 C4.2 67.31,-73.765 67.31,-73.025 66.04,-71.755 R10.1 55.245,-71.755 54.61,-72.39 52.83,-72.39 C10.2 ; v1(78.74,-12.7) 78.74,-12.065 77.597,-10.922 SW1.1 79.883,-9.652 81.28,-8.255 81.28,-3.81 82.55,-2.54 98.425,-2.54 99.06,-3.175 99.06,-4.445 98.305,-5.2 R17.3 ; U7.4 C26.1 ; v1(81.28,-80.01) v1(86.995,-80.01) ; v1(96.52,-82.55) 96.52,-81.28 v1(99.06,-78.74) ; v1(104.775,-67.31) 105.41,-67.31 106.68,-66.04 118.745,-66.04 120.015,-64.77 Cout4.1 120.015,-55.88 122.555,-53.34 122.555,-47.625 121.4,-46.47 Cout3.2 120.025,-40.65 PTGND.1 116.205,-40.64 116.005,-40.44 U3V3.1 114.045,-38.355 114.3,-38.1 Cout1.2 ; Cout2.2 111.23,-34.925 Cout1.2 ; J_GND.1@135.255,-16.51 J_GND.1 ; v1(138.43,-36.195) 127.635,-36.195 125.73,-34.29 Cin.2 119.38,-34.29 118.745,-34.925 Cout1.2 ; C7.2@42.29,-49.645 C8.2 C8.2@49.597,-49.645 ; C8.2@49.597,-49.645 53.225,-49.645 ; 50.8,-62.23 U1.11 50.8,-69.215 52.715,-71.13 C10.2 ; 72.39,-38.735 69.85,-36.195 C18.1 62.865,-36.195 61.595,-34.925 61.595,-33.655 62.865,-32.385 67.945,-32.385 71.12,-29.21 71.12,-28.575 72.39,-27.305 C26.1
  BottomLayer w0.5: J5.14 J5.16 J5.15 18.415,-12.7 19.685,-11.43 19.685,-10.795 C25.1 ; ICSP.3 C25.1 ; v1(31.75,-34.925) 31.75,-36.83 32.385,-37.465 41.275,-37.465 42.227,-36.512 42.545,-36.83 v1(42.227,-36.83) ; v1(31.75,-10.795) 30.48,-12.065 23.495,-12.065 22.225,-10.795 22.225,-9.525 C25.1 ; v1@34.175,-49.645 v1(34.405,-49.645) 33.655,-50.395 33.655,-56.515 v1(36.195,-59.055) ; J2.16 43.79,-91.44 50.165,-91.44 50.8,-90.805 50.8,-90.17 J2.14 ; J2.18 52.98,-91.715 52.07,-90.805 J2.14 ; v1(55.245,-80.645) 53.975,-80.645 J2.10 56.515,-82.55 57.15,-81.915 57.15,-75.565 v1(55.88,-74.295) ; v1(56.515,-57.15) 59.69,-53.975 70.485,-53.975 72.39,-52.07 72.39,-48.895 ; v1(57.15,-85.09) 57.15,-88.265 56.515,-88.9 J2.14 ; v1(67.945,-52.705) 67.945,-50.06 C3.2 68.07,-49.935 71.35,-49.935 72.39,-48.895 ; v1(71.12,-21.59) D1.2 72.39,-17.145 73.025,-16.51 73.025,-15.365 73.785,-14.605 77.47,-14.605 78.74,-13.335 v1(78.74,-12.7) ; v1(72.39,-41.91) 72.39,-48.895 ; v1(74.295,-80.01) J6.2 v1(81.28,-80.01) ; v1(86.995,-80.01) JCapTemp1.3 90.055,-80.125 CdT1.2 ; RH2.1 JCapHyg2.3 ; CdT1.2@90.17,-86.87 CdT1.2 ; v1(96.52,-82.55) 97.79,-83.82 99.185,-83.82 CdT2.2 99.175,-84.34 98.425,-85.09 98.425,-85.725 97.165,-86.985 CdT1.2 ; CdH2.2 98.935,-51.435 JCapHyg2.3 ; v1(99.06,-78.74) JCapTemp2.3 104.14,-78.74 104.775,-78.105 104.775,-70.485 JCapHyg1.3@100.33,-66.04 ; v1(104.775,-67.31) 104.14,-66.675 104.14,-64.665 CdH1.2 103.62,-64.655 102.235,-66.04 JCapHyg1.3@100.33,-66.04 ; J_GND.1 135.255,-15.875 139.7,-20.32 139.7,-34.925 v1(138.43,-36.195) ; JCapHyg2.3 92.71,-48.895 91.44,-47.625 83.82,-47.625 81.915,-49.53 81.915,-62.865 83.82,-64.77 RH1.1 96.52,-64.77 97.79,-66.04 JCapHyg1.3 JCapHyg1.3@100.33,-66.04
LEDA: J2.15 R3.1 | length 75.9
  TopLayer w0.3: v1(22.86,-86.36) 24.765,-88.265 v1(27.305,-88.265)
  TopLayer w0.5: v1(31.75,-41.275) 32.385,-41.275 33.02,-41.91 R3.1
  BottomLayer w0.3: v1(22.86,-86.36) 22.86,-66.675 26.035,-63.5 26.035,-42.545 27.305,-41.275 v1(31.75,-41.275) ; v1(27.305,-88.265) 27.94,-88.9 27.94,-91.44 29.21,-92.71 39.48,-92.71 J2.15
LEDB: J2.17 R4.1 | length 81.6
  TopLayer w0.3: J2.17 J2.17@50.56,-93.08
  TopLayer w0.5: v1(31.115,-46.355) R4.1
  BottomLayer w0.3: v1(31.115,-46.355) 28.575,-46.355 27.94,-46.99 27.94,-63.5 24.65,-66.79 24.65,-93.23 26.67,-95.25 49.75,-95.25 50.44,-94.56 J2.17
MCLR: ICSP.1 Rmclr.2 U2.18 | length 40.2
  TopLayer w0.3: U2.18 44.362,-20.155 44.712,-20.505 47.44,-20.505 v1(48.895,-19.05)
  BottomLayer w0.3: ICSP.1 29.439,-7.214 Rmclr.2 31.75,-8.89 34.29,-11.43 46.358,-11.43 49.16,-14.232 49.16,-18.785 v1(48.895,-19.05)
NetC1_2: C1.2 U1.1 | length 14
  TopLayer w0.3: C1.2 27.94,-66.675 28.575,-66.04 36.83,-66.04 38.1,-64.77 U1.1
NetC2_1: C2.1 U2.23 | length 16.3
  TopLayer w0.3: U2.23 40.195,-13.78 42.545,-11.43 49.53,-11.43 C2.1
NetC3_1: C3.1 J2.1 R6.1 R7.1 | length 60.6
  TopLayer w0.3: v1(58.42,-53.34) v1(60.96,-55.88)
  BottomLayer w0.3: J2.1 40.64,-75.565 46.355,-69.85 53.975,-69.85 60.96,-62.865 v1(60.96,-55.88) ; v1(58.42,-53.34) 59.055,-52.705 59.055,-50.8 59.69,-50.165 R7.1 62.001,-51.206 62.865,-52.07 65.405,-52.07 66.805,-50.67 66.805,-49.343 67.888,-48.26 C3.1 66.675,-46.99 R6.1
NetC4_1: C4.1 R5.1 R8.1 | length 14.5
  TopLayer w0.3: R8.1 62.23,-78.569 62.943,-79.282 65.483,-79.282 65.962,-78.803 65.962,-77.47 64.414,-75.921 R5.1 66.547,-76.835 C4.1
NetC5_1: C5.1 U1.24 Y1.1 | length 20.1
  TopLayer w0.3: C5.1 39.37,-41.275 38.1,-42.545 38.1,-43.937 40.721,-46.558 41.26,-46.558 41.45,-46.368 41.91,-46.827 41.91,-46.99 42.545,-47.625 43.306,-47.625 v1(43.967,-48.285) ; U1.24 43.18,-53.34 43.815,-52.705 v1(43.815,-52.07)
  BottomLayer w0.3: v1(43.815,-52.07) 43.815,-48.437 v1(43.967,-48.285)
NetC6_1: C6.1 U1.23 Y1.2 | length 20
  TopLayer w0.3: U1.23 44.45,-53.34 v1(45.72,-52.07) ; v1(46.99,-48.26) 47.625,-47.625 48.773,-47.625 49.515,-46.883 50.434,-46.883 Y1.2@50.95,-46.368 ; Y1.2@50.8,-45.293 Y1.2@50.953,-45.446 ; C6.1 51.435,-41.275 53.34,-43.18 53.34,-43.977 51.587,-45.731 Y1.2@51.587,-46.254
  BottomLayer w0.3: v1(45.72,-52.07) 45.72,-49.53 v1(46.99,-48.26)
NetC12_1: C12.1 R13.1 SW1.3 U2.26 | length 66.3
  TopLayer w0.3: U2.26 37.895,-15.155 37.895,-14.24 41.96,-10.175 44.948,-10.175 44.963,-10.16 47.625,-10.16 48.26,-9.525 48.26,-6.35 47.625,-5.715 R13.1 v1(46.355,-3.175) ; v1(73.66,-7.62) 73.66,-6.985 75.565,-5.08 SW1.3 77.47,-4.953 77.47,-3.175 v1(76.2,-1.905)
  BottomLayer w0.3: v1(46.355,-3.175) 48.26,-1.27 75.565,-1.27 v1(76.2,-1.905) ; C12.1 v1(73.66,-7.62)
NetD1_1: D1.1 R12.1 | length 10.7
  TopLayer w0.3: R12.1 61.595,-12.7 v1(65.405,-16.51)
  BottomLayer w0.3: v1(65.405,-16.51) 66.04,-17.145 D1.1
NetJ2_2: J2.2 R6.2 U1.17 | length 61.2
  TopLayer w0.3: U1.17 52.085,-55.075 52.085,-51.42 v1(52.705,-50.8) ; v1(56.515,-46.99) v1(60.325,-46.99)
  BottomLayer w0.3: J2.2@41.914,-82.546 J2.2 36.83,-82.55 36.195,-81.915 36.195,-77.47 45.085,-68.58 48.26,-68.58 48.895,-67.945 48.895,-60.325 52.705,-56.515 v1(52.705,-50.8) v1(56.515,-46.99) ; v1(60.325,-46.99) R6.2
NetJ2_3: J2.3 R7.2 U1.16 | length 56.6
  TopLayer w0.3: v1(53.34,-68.58) 53.975,-68.58 54.61,-69.215 54.61,-70.485 v1(53.975,-71.12) ; U1.16 53.34,-52.705 v1(53.975,-52.07)
  BottomLayer w0.3: J2.3 43.18,-74.93 46.99,-71.12 v1(53.975,-71.12) ; v1(53.34,-68.58) 52.705,-67.945 52.705,-58.42 53.975,-57.15 v1(53.975,-52.07) 55.245,-53.34 56.515,-53.34 57.15,-52.705 57.15,-50.165 58.42,-48.895 63.5,-48.895 63.97,-49.365 63.97,-50 R7.2
NetJ2_4: J2.4 R5.2 U1.13 | length 41.3
  TopLayer w0.3: U1.13 53.34,-67.307 53.976,-67.944 56.514,-67.944 v1(59.055,-70.485) ; v1(59.69,-73.66) 60.732,-74.702 R5.2
  BottomLayer w0.3: J2.4 44.45,-83.185 45.72,-84.455 50.165,-84.455 50.27,-84.35 55.634,-84.35 59.69,-80.294 v1(59.69,-73.66) 59.055,-73.025 v1(59.055,-70.485)
NetJ2_5: J2.5 R8.2 U1.12 | length 44.3
  TopLayer w0.3: U1.12 52.07,-62.98 52.705,-62.345 54.817,-62.345 55.88,-63.408 55.88,-64.77 v1(58.42,-67.31) ; v1(57.785,-73.66) 57.785,-74.295 59.69,-76.2 63.5,-76.2 64.364,-77.064 R8.2
  BottomLayer w0.3: J2.5 45.72,-78.105 46.99,-76.835 53.34,-76.835 54.61,-75.565 54.61,-73.66 56.515,-71.755 ; v1(57.785,-73.66) 56.515,-72.39 56.515,-71.755 ; v1(58.42,-67.31) 57.785,-67.945 57.785,-68.58 56.515,-69.85 56.515,-71.755
NetJP1_2: JP1.2 R1.2 | length 20.8
  TopLayer w0.3: R1.2 v1(18.415,-38.1)
  BottomLayer w0.3: JP1.2 17.78,-25.4 19.685,-27.305 19.685,-36.83 v1(18.415,-38.1)
NetJP2_2: JP2.2 R2.2 | length 10.3
  TopLayer w0.3: R2.2 v1(17.145,-34.29)
  BottomLayer w0.3: JP2.2 17.145,-29.845 18.415,-31.115 18.415,-33.02 v1(17.145,-34.29)
NetR3_2: R3.2 U1.27 | length 19.7
  TopLayer w0.3: R3.2 35.154,-41.046 35.56,-40.64 v1(36.195,-40.64) ; U1.27 v1(39.37,-50.8)
  BottomLayer w0.3: v1(36.195,-40.64) 36.83,-41.275 36.83,-46.99 39.37,-49.53 v1(39.37,-50.8)
NetR4_2: R4.2 U1.26 | length 13.6
  TopLayer w0.3: R4.2 35.56,-46.761 v1(35.56,-48.26) ; U1.26 v1(40.64,-52.705)
  BottomLayer w0.3: v1(35.56,-48.26) 35.56,-52.07 36.195,-52.705 v1(40.64,-52.705)
NetR9_1: R9.1 R10.2 | length 3.8
  TopLayer w0.3: R9.1 62.23,-66.675 62.23,-67.894 62.865,-68.529 R10.2
NetR9_2: R9.2 U1.14 | length 17.3
  TopLayer w0.3: U1.14 54.61,-65.121 58.562,-69.073 59.832,-69.073 60.325,-68.58 60.325,-65.405 61.316,-64.414 63.779,-64.414 64.364,-64.999 R9.2
NetR12_2: R12.2 U2.27 | length 31.5
  TopLayer w0.3: U2.27 36.995,-16.192 37.645,-16.842 37.645,-17.96 v1(38.1,-18.415) ; v1(42.545,-14.605) 43.815,-13.335 43.815,-12.7 44.435,-12.08 49.799,-12.08 51.719,-10.16 55.88,-10.16 57.379,-8.661 R12.2
  BottomLayer w0.3: v1(38.1,-18.415) 38.735,-18.415 v1(42.545,-14.605)
NetR16_1: R16.1 R17.2 | length 8
  TopLayer w0.3: R16.1 85.09,-8.89 87.63,-6.35 R17.2
NetU1_9: U1.9 U2.25 | length 108.7
  TopLayer w0.3: v1(27.305,-38.1) 25.4,-38.1 19.685,-43.815 19.685,-60.96 16.51,-64.135 16.51,-73.66 17.145,-74.295 43.815,-74.295 48.26,-69.85 U1.9 ; U2.25 38.595,-17.005 39.37,-17.78 39.37,-19.685 v1(39.37,-22.86)
  BottomLayer w0.3: v1(27.305,-38.1) 30.48,-34.925 30.48,-33.655 39.37,-24.765 v1(39.37,-22.86)
PGC: ICSP.5 U2.16 | length 61.5
  TopLayer w0.3: U2.16 41.945,-21.805 50.585,-21.805 v1(50.8,-21.59)
  BottomLayer w0.3: ICSP.5 19.685,-1.27 41.91,-1.27 44.45,-3.81 44.45,-9.525 45.055,-10.13 47.244,-10.13 50.434,-13.32 50.449,-13.32 51.435,-14.306 51.435,-20.955 v1(50.8,-21.59)
PGD: ICSP.4 U2.17 | length 54.8
  TopLayer w0.3: U2.17 44.243,-20.955 44.443,-21.155 48.695,-21.155 v1(49.53,-20.32)
  BottomLayer w0.3: ICSP.4 21.59,-1.905 40.64,-1.905 43.18,-4.445 43.18,-9.525 44.435,-10.78 46.975,-10.78 50.165,-13.97 50.18,-13.97 50.18,-18.699 50.165,-18.714 50.165,-19.685 v1(49.53,-20.32)
RA0: J5.11 U2.19 | length 49.4
  TopLayer w0.3: U2.19 44.835,-19.355 v1(45.085,-19.605)
  BottomLayer w0.3: J5.11 8.255,-17.78 8.89,-17.145 8.89,-16.653 11.093,-14.45 19.205,-14.45 19.84,-13.815 31.205,-13.815 31.685,-13.335 44.45,-13.335 45.72,-14.605 45.72,-19.05 45.165,-19.605 v1(45.085,-19.605)
RA1: J5.12 U2.20 | length 53.6
  TopLayer w0.3: U2.20 46.215,-18.555 v1(46.99,-17.78)
  BottomLayer w0.3: J5.12 6.35,-16.51 8.255,-16.51 10.865,-13.9 18.912,-13.9 19.547,-13.265 30.977,-13.265 31.471,-12.771 45.649,-12.771 46.99,-14.113 v1(46.99,-17.78)
RA2: J5.13 U2.21 | length 51
  TopLayer w0.3: U2.21 45.06,-17.755 48.21,-14.605 v1(48.26,-14.605)
  BottomLayer w0.3: J5.13 7.62,-14.62 8.89,-13.35 18.684,-13.35 19.319,-12.715 30.749,-12.715 31.399,-12.065 45.72,-12.065 v1(48.26,-14.605)
RA3: R16.2 U2.22 | length 55.5
  TopLayer w0.3: U2.22 43.37,-16.955 45.72,-14.605 45.72,-13.365 46.355,-12.73 59.72,-12.73 67.31,-20.32 78.283,-20.32 80.01,-18.593 80.01,-13.335 81.686,-11.659 R16.2
RA6: U2.31 U4.1 | length 53.8
  TopLayer w0.3: U2.31 33.795,-17.285 34.925,-18.415 v1(34.925,-22.225) ; v1(73.025,-29.21) 73.025,-32.025 U4.1
  BottomLayer w0.3: v1(34.925,-22.225) 38.732,-22.225 38.997,-21.96 49.897,-21.96 50.427,-22.49 66.94,-22.49 69.215,-24.765 69.215,-27.94 70.485,-29.21 v1(73.025,-29.21)
RA7: U2.30 U7.1 | length 77.3
  TopLayer w0.3: U2.30 34.595,-14.34 31.95,-11.695 31.377,-11.695 30.85,-11.168 30.85,-2.805 32.4,-1.255 52.339,-1.255 54.894,-3.81 54.894,-5.999 55.175,-6.28 62.24,-6.28 73.74,-17.78 v1(76.2,-17.78) ; v1(76.2,-22.225) 77.47,-23.495 U7.1
  BottomLayer w0.3: v1(76.2,-22.225) v1(76.2,-17.78)
RC3: U1.8 U2.37 U4.6 U7.6 | length 300.2
  TopLayer w0.3: v1(24.13,-41.275) 20.32,-45.085 20.32,-61.103 17.145,-64.278 17.145,-71.755 17.78,-72.39 36.83,-72.39 38.1,-73.66 ; U2.37 30.595,-19.455 32.79,-19.455 v1(33.02,-19.685) ; v1(33.655,-83.185) 33.655,-92.075 35.702,-94.122 105.268,-94.122 111.125,-88.265 v1(111.125,-67.945) ; v1(36.195,-73.025) 36.83,-73.66 38.1,-73.66 ; U1.8 46.99,-69.85 43.18,-73.66 38.1,-73.66 ; U4.6 U4.6@81.28,-34.925 ; U7.6 85.015,-26.05 88.28,-26.05 89.52,-27.29 89.52,-33.655 88.885,-34.29 81.915,-34.29 U4.6@81.28,-34.925 ; v1(111.125,-64.135) 111.125,-63.5 110.49,-62.865 110.49,-56.515 107.315,-53.34 107.315,-48.26 101.615,-42.56 91.806,-42.56 88.265,-39.019 88.265,-35.56 87.63,-34.925 U4.6@81.28,-34.925
  BottomLayer w0.3: v1(24.13,-41.275) 26.405,-39 26.405,-37.727 26.932,-37.2 26.935,-37.2 29.83,-34.305 29.83,-33.035 34.29,-28.575 34.29,-22.863 34.025,-22.598 34.025,-20.69 v1(33.02,-19.685) ; v1(33.655,-83.185) 33.655,-82.55 34.29,-81.915 34.29,-73.66 34.925,-73.025 v1(36.195,-73.025) ; v1(111.125,-67.945) v1(111.125,-64.135)
RC4: U1.6 U2.42 U4.2 U7.2 | length 319
  TopLayer w0.3: v1(22.225,-48.895) 22.055,-48.895 21.42,-49.53 21.42,-61.558 18.415,-64.563 18.415,-70.485 19.05,-71.12 33.655,-71.12 34.29,-70.485 41.91,-70.485 42.545,-71.12 ; v1(26.035,-24.765) 26.035,-24.13 26.81,-23.355 U2.42 ; v1(31.75,-83.82) 31.75,-92.075 34.925,-95.25 105.41,-95.25 112.395,-88.265 v1(112.395,-69.85) ; v1(40.005,-71.12) 40.64,-71.755 41.91,-71.755 42.545,-71.12 ; U1.6 44.45,-69.215 42.545,-71.12 ; v1(71.12,-31.115) 70.485,-31.75 70.485,-33.02 71.12,-33.655 U4.2 ; v1(74.93,-23.495) 76.2,-23.495 77.47,-24.765 U7.2 ; v1(78.74,-39.37) 85.09,-39.37 90.17,-44.45 100.822,-44.45 102.87,-46.498 v1(102.87,-55.88)
  BottomLayer w0.3: v1(22.225,-48.895) 21.59,-48.26 21.59,-40.005 28.575,-33.02 28.575,-28.575 26.035,-26.035 v1(26.035,-24.765) ; v1(31.75,-83.82) 31.75,-83.185 33.02,-81.915 33.02,-73.025 34.925,-71.12 v1(40.005,-71.12) ; v1(71.12,-31.115) 73.66,-31.115 74.295,-30.48 74.295,-24.13 v1(74.93,-23.495) 77.47,-26.035 77.47,-38.735 78.105,-39.37 v1(78.74,-39.37) ; v1(102.87,-55.88) 107.315,-60.325 110.49,-60.325 112.395,-62.23 v1(112.395,-69.85)
RC5: U1.7 U2.43 U4.5 U7.5 | length 266.7
  TopLayer w0.3: v1(22.86,-45.72) 20.87,-47.71 20.87,-61.331 17.78,-64.421 17.78,-71.12 18.415,-71.755 39.367,-71.755 40.637,-73.025 ; v1(27.94,-25.4) 27.94,-24.765 28.55,-24.155 U2.43 ; v1(35.56,-83.185) 36.195,-83.185 36.83,-83.82 48.257,-83.82 49.53,-85.093 49.53,-89.754 51.076,-91.3 106.185,-91.3 109.22,-88.265 v1(109.22,-68.58) ; v1(38.735,-72.39) 39.37,-73.025 40.637,-73.025 ; U1.7 45.72,-69.85 42.545,-73.025 40.637,-73.025 ; U4.5 v1(84.455,-36.195) 92.075,-43.815 100.965,-43.815 106.765,-49.615 106.765,-54.118 109.22,-56.573 v1(109.22,-64.135) ; U7.5 85.725,-28.03 v1(85.725,-33.02)
  BottomLayer w0.3: v1(22.86,-45.72) 22.86,-40.005 29.21,-33.655 29.21,-27.305 27.94,-26.035 v1(27.94,-25.4) ; v1(35.56,-83.185) 35.56,-75.565 v1(38.735,-72.39) ; v1(84.455,-36.195) 85.725,-34.925 v1(85.725,-33.02) ; v1(109.22,-68.58) v1(109.22,-64.135)
RC6: J6.3 U2.44 | length 164.6
  TopLayer w0.3: v1(23.495,-33.02) 24.13,-32.385 24.13,-28.572 25.947,-26.755 29.125,-26.755 30.495,-25.385 U2.44
  BottomLayer w0.3: v1(23.495,-33.02) 22.368,-33.02 20.885,-34.503 20.885,-37.681 6.35,-52.216 6.35,-90.805 8.255,-92.71 8.255,-95.25 8.905,-95.9 71.74,-95.9 72.39,-95.25 72.39,-93.553 73.66,-92.283 73.66,-83.82 74.93,-82.55 J6.3
RC7: J6.4 U2.1 | length 163.7
  TopLayer w0.3: v1(25.4,-28.575) 26.67,-27.305 31.545,-27.305 U2.1
  BottomLayer w0.3: v1(25.4,-28.575) 25.4,-29.21 20.335,-34.275 20.335,-37.453 5.73,-52.058 5.73,-91.171 7.635,-93.076 7.635,-95.616 8.539,-96.52 72.375,-96.52 73.01,-95.885 73.01,-93.711 74.295,-92.426 74.295,-85.725 74.93,-85.09 J6.4
RD0: J5.3 JP1.1 U2.38 | length 26.5
  TopLayer w0.3: v1(13.97,-23.495) 14.605,-23.495 17.945,-20.155 U2.38
  BottomLayer w0.3: J5.3 10.16,-27.94 12.065,-26.035 JP1.1 v1(13.97,-23.495)
RD1: J5.4 JP2.1 U2.39 | length 67.7
  TopLayer w0.3: v1(17.78,-15.875) v1(17.78,-10.795) ; v1(22.19,-21.055) 22.19,-20.99 22.225,-20.955 U2.39
  BottomLayer w0.3: JP2.1 11.43,-29.21 6.35,-29.21 J5.4 3.175,-27.94 1.905,-26.67 1.905,-10.795 3.175,-9.525 16.51,-9.525 v1(17.78,-10.795) ; v1(17.78,-15.875) 17.145,-15.875 16.775,-16.245 16.775,-18.537 19.278,-21.04 19.913,-21.04 19.928,-21.055 v1(22.19,-21.055)
RD2: J5.5 U2.40 | length 58.6
  TopLayer w0.3: v1(15.875,-15.875) v1(15.875,-10.795) ; v1(20.32,-22.225) 20.44,-22.105 29.23,-22.105 29.48,-21.855 30.195,-21.855 U2.40@30.395,-21.655
  BottomLayer w0.3: J5.5 6.35,-26.67 3.175,-26.67 2.54,-26.035 2.54,-11.287 3.582,-10.245 15.155,-10.245 15.705,-10.795 v1(15.875,-10.795) ; v1(15.875,-15.875) 15.875,-18.415 19.05,-21.59 19.685,-21.59 v1(20.32,-22.225)
RD3: J5.6 U2.41 | length 52.8
  TopLayer w0.3: v1(13.335,-11.43) 13.335,-15.875 14.605,-17.145 v1(14.605,-17.78) ; v1(21.59,-23.495) 22.43,-22.655 30.395,-22.655 U2.41
  BottomLayer w0.3: J5.6 3.81,-25.4 3.175,-24.765 3.175,-11.43 3.81,-10.795 12.7,-10.795 v1(13.335,-11.43) ; v1(14.605,-17.78) 14.605,-19.685 15.24,-20.32 16.833,-20.32 20.008,-23.495 v1(21.59,-23.495)
RD4: J5.7 U2.2 | length 39
  TopLayer w0.3: v1(21.59,-28.575) 21.59,-29.845 22.225,-30.48 22.225,-33.655 22.86,-34.29 23.495,-34.29 23.865,-33.92 24.395,-33.92 26.935,-31.38 v1(30.212,-31.38) ; v1(31.115,-28.205) 31.24,-28.08 32.485,-28.08 32.895,-27.67 32.895,-26.755 U2.2
  BottomLayer w0.3: J5.7 9.44,-22.86 10.16,-22.14 16.282,-22.14 21.59,-27.448 v1(21.59,-28.575) ; v1(30.212,-31.38) 30.215,-31.38 31.115,-30.48 v1(31.115,-28.205)
RD5: J5.8 U2.3 | length 41.8
  TopLayer w0.3: v1(10.16,-23.495) 11.43,-22.225 11.43,-20.32 12.065,-19.685 16.51,-19.685 17.78,-18.415 v1(22.86,-18.415) ; v1(33.02,-22.225) 33.695,-22.9 33.695,-26.555 U2.3
  BottomLayer w0.3: J5.8@5.32,-22.86 J5.8 6.35,-24.13 9.525,-24.13 v1(10.16,-23.495) ; v1(22.86,-18.415) 23.09,-18.645 23.09,-22.455 24.13,-23.495 31.75,-23.495 v1(33.02,-22.225)
RD6: J5.9 U2.4 | length 32.7
  TopLayer w0.3: v1(27.2,-28.755) 27.2,-29.105 33.082,-29.105 34.595,-27.592 U2.4
  BottomLayer w0.3: J5.9 8.89,-20.32 9.61,-21.04 16.775,-21.04 22.86,-27.125 26.001,-27.125 26.85,-27.974 26.85,-28.575 27.03,-28.755 v1(27.2,-28.755)
RD7: J5.10 U2.5 | length 37.8
  TopLayer w0.3: v1(26.67,-30.48) 32.485,-30.48 35.295,-27.67 35.295,-26.755 U2.5
  BottomLayer w0.3: J5.10 6.35,-21.59 16.51,-21.59 22.595,-27.675 25.773,-27.675 26.3,-28.202 26.3,-30.11 v1(26.67,-30.48)
VCC: Cin.1 J1.1 J_VCC.1 U5V.1 | length 47.7
  TopLayer w0.5: v1(112.015,-26.415) U5V.1 ; Cin.1 v1(124.46,-31.115)
  BottomLayer w0.5: v1(112.015,-26.415) 113.03,-27.43 124.585,-27.43 J1.1@127.635,-30.48 ; v1(124.46,-31.115) 125.095,-30.48 J1.1@127.635,-30.48 ; J_VCC.1 135.255,-41.91 127.905,-34.56 J1.1 J1.1@127.635,-30.48
pads on no net: ICSP.6 J1.2 J1.3 J2.6 J2.7 J2.8 J2.9 J2.11 J2.12 J2.13 JCapTemp1.1 JCapTemp2.1 SW1.2 SW1.4 U1.3 U1.4 U1.5 U2.12 U2.13 U2.14 U2.15 U2.24 U2.32 U2.33 U2.34 U2.35 U2.36 U5V.4
copper on no net: | length 1.1
  TopLayer w0.3: 40.991,-45.908 41.275,-45.623 ; 50.165,-46.233 50.49,-45.908 50.317,-45.735

## Polygon pours and split planes (outlines as drawn)
GND on BottomLayer "gnd-bottom" (solid, remove dead copper, pour order 9): 0,0 0,-100.33 141.605,-100.33 141.605,0 0,0

## Other copper
TopLayer:
  text "Face Top" at 5.715,-87.63 h1.91 r90
  text "NOM DU BINOME: RANDOLPH LADRANGE" at 75.565,-99.06 h1.8
BottomLayer:
  text "Face Bottom" at 2.54,-71.12 h1.91 r90
  text "NOM DU BINOME: RANDOLPH LADRANGE" at 131.318,-96.012 h1.8

## Silkscreen, mask and mechanical layers (free items; w line width, h text height)
Mechanical15:
  the board outline again, w0.508

## Text inside footprints (layer, text, board x,y; h text height)
C1: TopOverlay "+" at 33.618,-68.615 h1.43 r180
C2: TopOverlay "+" at 53.305,-10.758 h1.43 r90
Cin: TopOverlay "+" at 120.685,-28.612 h1.43 r270
Cout1: TopOverlay "+" at 113.7,-29.247 h1.43 r270
Cout4: TopOverlay "+" at 122.785,-56.785 h0.95 r90
J2: TopOverlay "GRN" at 43.54,-92.31 h1 r270; TopOverlay "YEL" at 48.14,-92.61 h1 r270
J5: TopOverlay "16" at 5.588,-11.176 h1.27 r90; TopOverlay "15" at 8.128,-11.176 h1.27 r90; TopOverlay "1" at 8.128,-33.02 h1.27 r90; TopOverlay "2" at 5.588,-33.02 h1.27 r90